# Altium PCB power.PcbDoc
Units mil, origin at the board's own origin, x right, y up, seen from the top; angles counter-clockwise.
Board outline 746 x 1150 mil, 2 copper layers (Top Layer, Bottom Layer); 2 components, 4 nets, 12 pads, 0 vias.
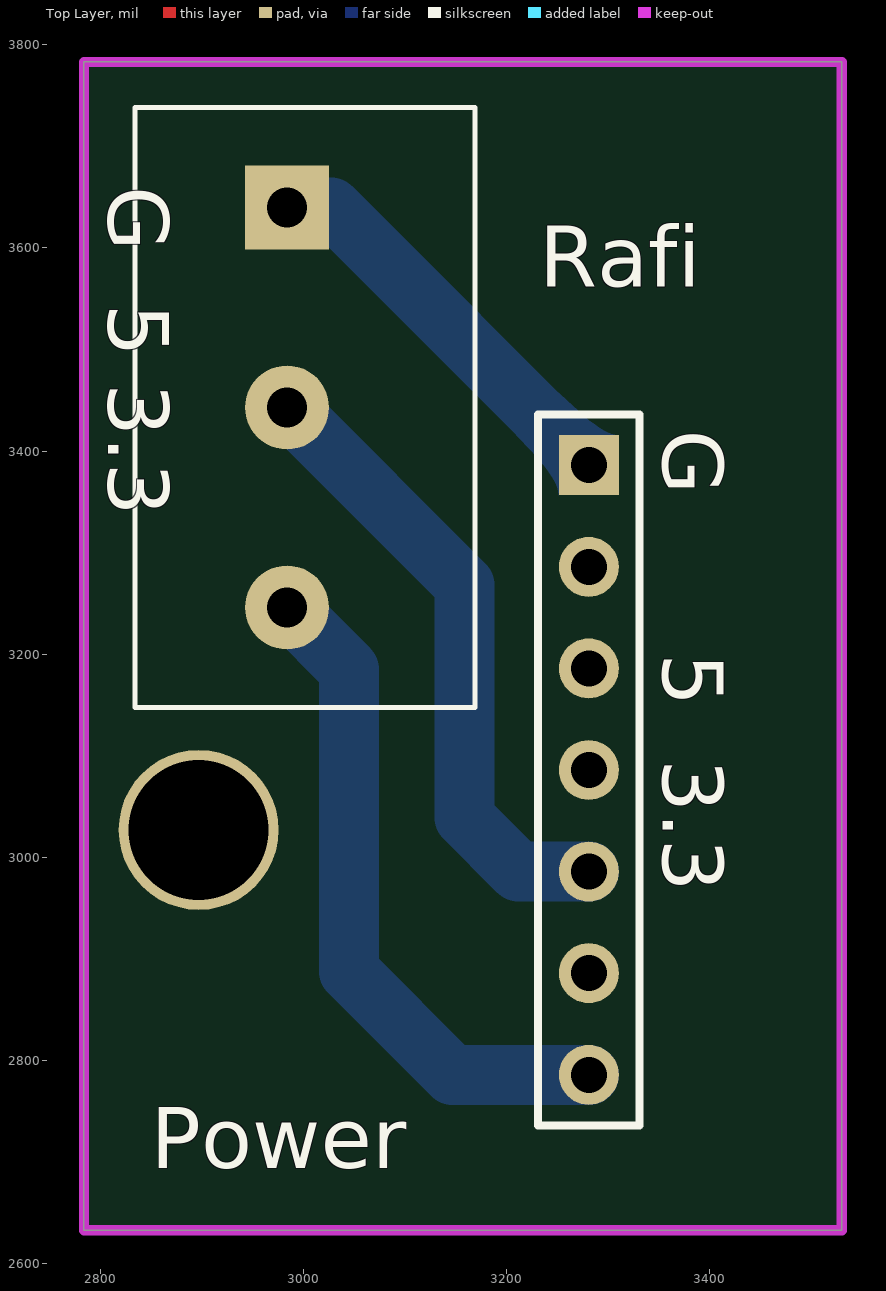
[diagram p0: Top Layer view]
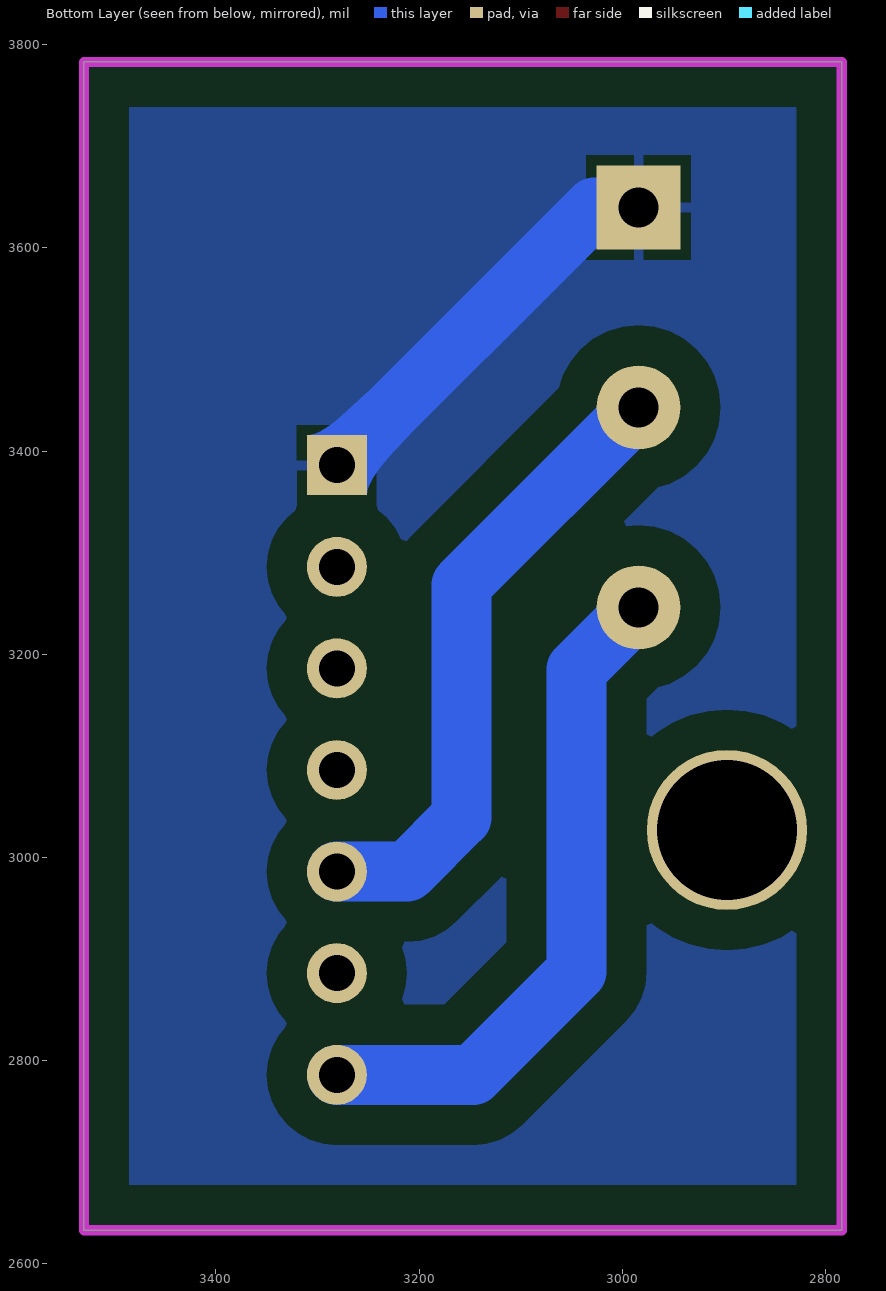
[diagram p1: Bottom Layer view, seen from below]

## Layer stack, top to bottom
Top Solder: solder mask 0.4, Solder Resist, Dk 3.5
Top Layer: signal copper 1.4
Dielectric 1: dielectric 12.6, FR-4, Dk 4.8
Bottom Layer: signal copper 1.4
Bottom Solder: solder mask 0.4, Solder Resist, Dk 3.5

## Board outline
2784,2633.2 2784,3783.2 3530,3783.2 3530,2633.2

## Design rules (kind name [scope] priority, off if disabled: settings)
Clearance [All] p1: gap=39.37
PolygonConnect [All] p1: connectstyle=Relief reliefconductorwidth=10 reliefentries=4 polygonreliefangle="90 Angle" airgapwidth=10
RoutingVias [All] p1: holewidth=28 width=50 viastyle="Through Hole" minholewidth=28 minwidth=50 maxholewidth=28 maxwidth=50
SolderMaskExpansion [All] p1: expansion=4
Width [All] p1: maxlimit=59.06 minlimit=59.06 preferedwidth=59.06
30 further rules are at their usual default settings.

## Components (designator, comment, footprint, x,y, rotation, side; value= is the part's Value field where it differs from the comment)
"G  5 3.3" "WE-Terminal Blocks Plugable Type 691311700003" 691311700003 2984,3443 r270 top (schematic designator C?)
"G      5  3.3" "Header 7" HDR1X7 3281,3386.2 r270 top (schematic designator P?)

## Footprints (in the part's own frame and the unit in brackets; to place one, negate y for a bottom-side part, rotate by r counter-clockwise, add the part's x,y. Pads: shape width x height; smd on the part's side, far side on the other; paste and mask are expansions set on the pad)
691311700003 [mm] "5.00mm - Open Vertical PCB Header - 03p"
  rect 2.1x2.1 hole 1: 1(-5,0)
  round 2.1 hole 1: 2(0,0) 3(5,0)
  silkscreen extent -7.5,-3.8 7.5,4.7, body extent -7.5,-3.8 7.5,4.7, height 12.01
HDR1X7 [mm] "Connector; Header; 7 Position"
  rect 1.5x1.5 hole 0.9: 1(0,0)
  round 1.5 hole 0.9: 2(2.54,0) 3(5.08,0) 4(7.62,0) 5(10.16,0) 6(12.7,0) 7(15.24,0)
  silkscreen extent -1.27,-1.27 16.51,1.27

## Part data
"G  5 3.3": "WR-TBL Terminal block - serie 3117 - 5.00mm"
"G      5  3.3": "Header, 7-Pin"

## Free pads (board coordinates)
  round 157.48 hole 137.8: 8(2897,3027.2) 8(2897,3027.2)

## Nets (pads, with @x,y where several pads share a name; then routed paths per layer and width w, separated by ;. In a path a pad name is that pad's centre, name@x,y a point inside that pad or via, vN(x,y) a via of type N, cw(c..) or ccw(c..) an arc to the next point about the centre after c; other vN are vias at no path point)
+3.3: "G  5 3.3.3" "G      5  3.3.7" | length 661.6
  Bottom Layer w59.06: 2984,3246.15 3045,3185.15 3045,2888 3146.8,2786.2 3281,2786.2
+5: "G  5 3.3.2" "G      5  3.3.5" | length 620.4
  Bottom Layer w59.06: 2984,3443 3158.5,3268.5 3158.5,3039.5 3211.8,2986.2 3281,2986.2
+7.4: "G      5  3.3.3"
GND: "G  5 3.3.1" "G      5  3.3.1" | length 402.1
  Bottom Layer w59.06: 2984,3639.85 3027.35,3639.85 3281,3386.2
pads on no net: "G      5  3.3.2" "G      5  3.3.4" "G      5  3.3.6"

## Polygon pours and split planes (outlines as drawn)
GND on Bottom Layer "Bottom Layer-GND" (solid): 2784,3783.2 3530,3783.2 3530,2633.2 2784,2633.2 2784,3783.2

## Keep-outs
Keep-Out Layer:
  the board outline again, w10

## Silkscreen, mask and mechanical layers (free items; w line width, h text height)
Top Overlay:
  text "Rafi" at 3232,3562 h60
  text "Power" at 2850,2694 h60